# Altium PCB Guillaume_Lanfroid-Nazac.PcbDoc (part 2 of 2)
Units mil, origin at the board's own origin, x right, y up, seen from the top; angles counter-clockwise.
Board outline 2755.91 x 1968.5 mil, 4 copper layers (Top Layer 1, GND, VCC, Bottom Layer 1), stack 61.948 mil thick; 93 components, 75 nets, 367 pads, 172 vias.
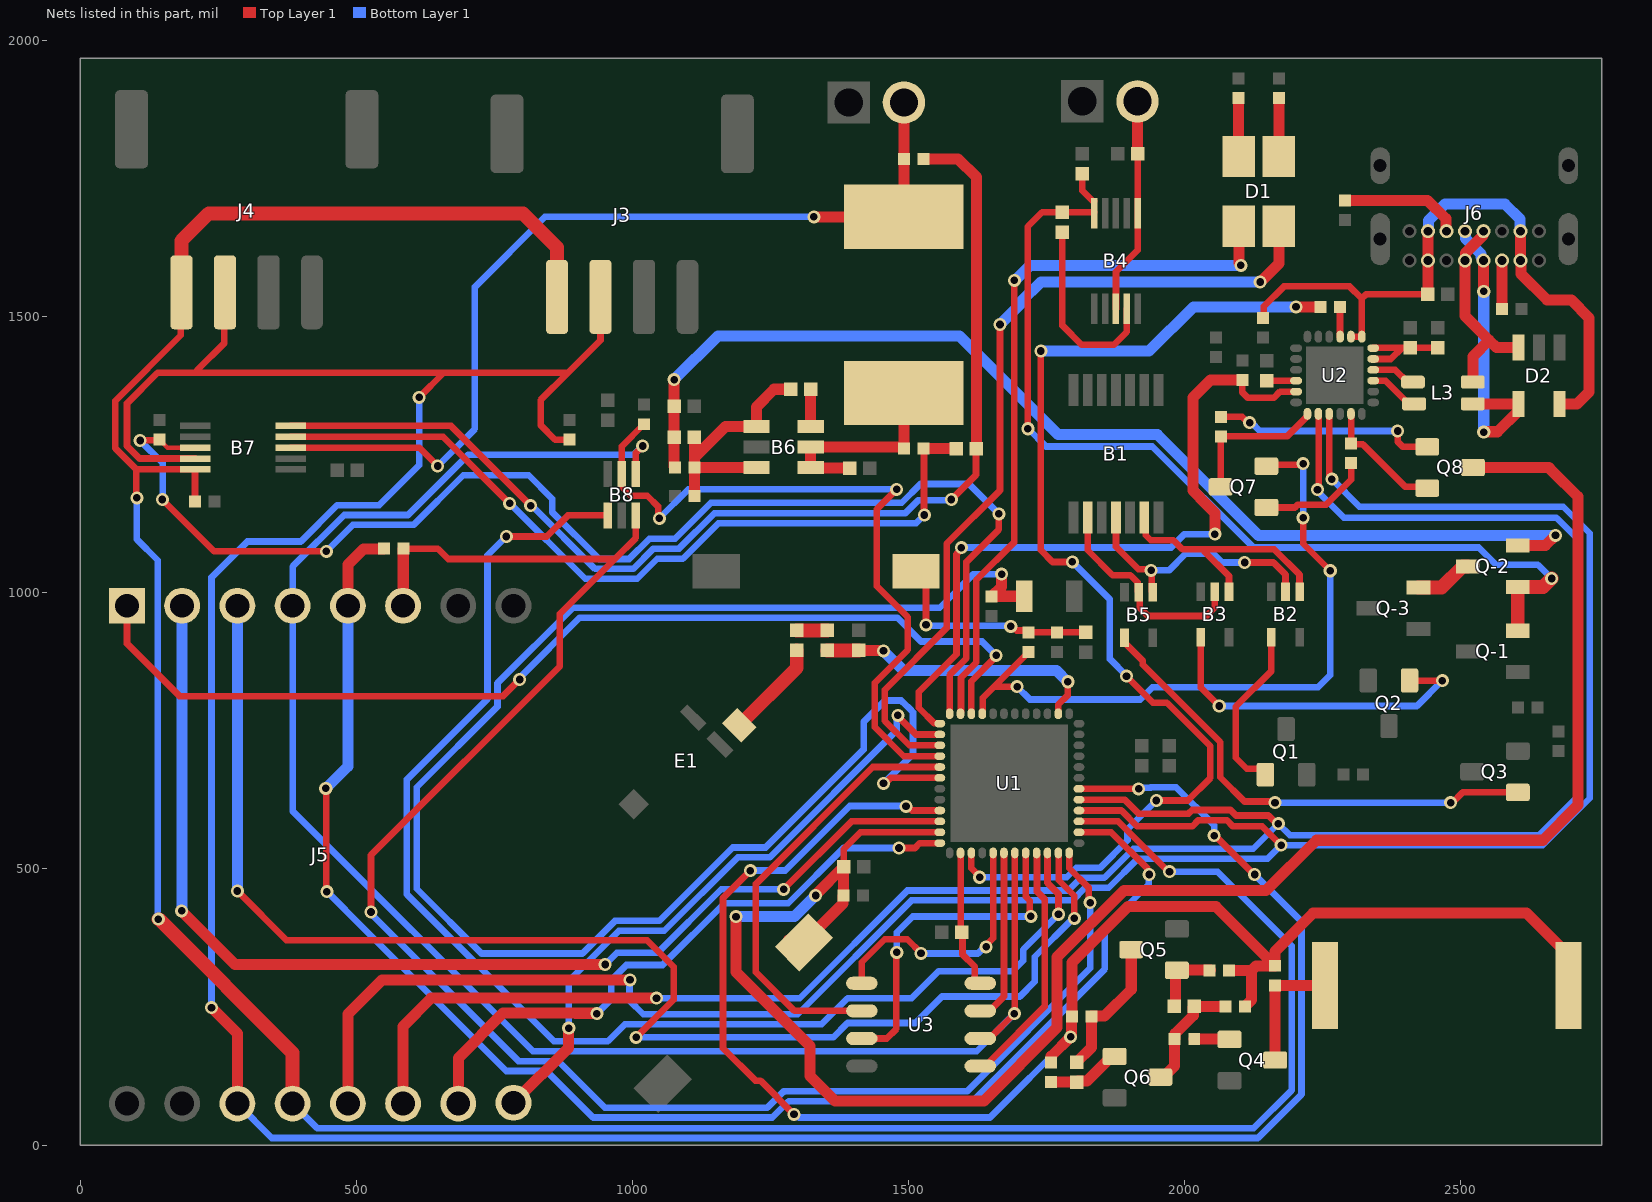
[diagram p4: the nets of this part, all layers, seen from the top]

## Via types
v1: diameter 23.62, hole 13.78, Top Layer 1 to Bottom Layer 1, 143 vias
v2: diameter 19.68, hole 7.87, Top Layer 1 to Bottom Layer 1, 29 vias

## Nets (pads, with @x,y where several pads share a name; then routed paths per layer and width w, separated by ;. In a path a pad name is that pad's centre, name@x,y a point inside that pad or via, vN(x,y) a via of type N, cw(c..) or ccw(c..) an arc to the next point about the centre after c; other vN are vias at no path point) (continued)
NetB1_2: B1.2 B3.2 B5.2 | length 400.2
  Top Layer 1 w12: B1.2@1824.82,1136.33 1824.92,1136.23 1824.92,1077.08 1870,1032 1902.19,1032 1915.13,1019.07 1915.13,1003.21 B5.2@1917,1001.34 1918.87,999.46 1918.87,973.13 1934,958 2040,958 2055,973 B3.2@2055,1002.34 B3.2@2054.14,1001.48
NetB1_4: B1.4 B2.2 B5.1 | length 478.4
  Top Layer 1 w12: B1.4@1876,1136.33 1876.01,1083.5 1916.66,1042.86 1937.34,1042.86 v1(1939.57,1040.63) ; v1@1939.57,1042 1941.08,1040.49 1941.08,1002.85 B5.1@1942.59,1001.34 ; v1(2109,1055) 2161,1055 2183,1033 B2.2@2183,1002.34
  Bottom Layer 1 w12: v1(1939.57,1040.63) 1972.09,1040.63 2002.42,1070.96 2051.91,1070.96 2067.87,1055 v1(2109,1055)
NetB1_6: B1.6 B2.1 B3.1 | length 468.2
  Top Layer 1 w12: B1.6@1927.18,1136.33 1930.04,1133.47 1930.04,1104.33 1938.98,1095.39 1980.01,1095.39 1996.69,1078.72 2037.72,1078.72 ; B3.1@2080.59,1002.34 2080.59,1030.41 2035,1076 2037.72,1078.72 ; B2.1@2208.59,1002.34 2208.25,1002.68 2208.25,1033.07 2162.61,1078.72 2037.72,1078.72
NetB2_4: B2.4 Q1.1 | length 311.9
  Top Layer 1 w12: Q1.1@2146.6,670.66 2146.6,671.72 2136.85,681.47 2112.85,681.47 2093,701.32 2093,794 2157.41,858.41 B2.4@2157.41,919.66
NetB3_4: B3.4 Q2.1 | length 621.3
  Top Layer 1 w12: B3.4@2029.41,919.66 2029.41,828.59 v1(2063,795) ; Q2.1@2407.74,841.34 2408.41,840.67 2466.67,840.67 v1(2467,841)
  Bottom Layer 1 w12: v1(2063,795) 2421,795 v1(2467,841)
NetB4_1: B4.1 B4.8 C2.1 J1.2 | length 392.1
  Top Layer 1 w12: B4.8@1876,1514.39 1876,1581.36 1915.37,1620.73 B4.1@1915.37,1687.61 1915.28,1687.71 1915.28,1794.83 C2.1@1915.06,1795.06
  Top Layer 1 w20: J1.2@1915,1890 J1.2@1915,1890 C2.1@1915.06,1795.06
NetB4_5: B4.5 C1.1 L1.2 Q-1.2 Q-2.1 | length 1765.1
  Top Layer 1 w12: v1(1716.28,1297.16) 1716.28,1663.28 1742.22,1689.22 L1.2@1779,1689.22 1810.86,1689.22 1836.54,1689.2 B4.5@1836.63,1689.11 ; C1.1@1815,1758.89 1815,1728.69 1834.51,1709.17 B4.5@1836.54,1709.17
  Top Layer 1 w25: Q-1.2@2603.61,931.4 Q-2.1@2603.61,1010.6 2649.6,1010.6 v1(2665,1026)
  Bottom Layer 1 w12: v1(1716.28,1297.16) 1717.21,1297.16 1749.28,1265.09 1941.67,1265.09 2124.77,1082 2533,1082 2564,1051 2640,1051 v1(2665,1026)
NetB4_9: B4.9 L1.1 | length 351.7
  Top Layer 1 w12: L1.1@1779,1653 1779,1484 1814,1449 1872,1449 1895.59,1472.59 1895.59,1514.29 B4.9@1895.68,1514.39
NetB5_4: B5.4 Q3.1 | length 890
  Top Layer 1 w12: B5.4@1891.41,918.66 1891.41,909.8 1924.69,876.53 1924.69,869.86 2064.91,729.63 2064.91,666.09 2108.78,622.22 2161.78,622.22 v1(2164,620) ; v1(2482,620) 2485.14,620 2503.74,638.6 Q3.1@2603.68,638.6
  Bottom Layer 1 w12: v1(2164,620) v1(2482,620)
NetB6_1: B6.1 B6.3 C5.1 L2.1 R7.2 R9.1 | length 465.7
  Top Layer 1 w20: L2.1@1112,1282 1112.36,1281.64 1112.36,1244.91 ; R9.1@1112.72,1175 R7.2@1112.72,1227 ; B6.3@1224.79,1226.6 1224.59,1226.8 1112.92,1226.8 R7.2@1112.72,1227 ; C5.1@1286.89,1369 1285,1369 1284.69,1368.69 1256.69,1368.69 1224.79,1336.79 B6.1@1224.79,1301.4 1169.2,1301.4 1112.72,1244.91 R7.2@1112.72,1227
NetB6_4: B6.4 B6.5 C4.1 R6.1 X1.2 | length 379.9
  Top Layer 1 w20: C4.1@1393.89,1226 1393.59,1226.3 1323.51,1226.3 B6.4@1323.21,1226.6 B6.5@1323.21,1264 1489.28,1264 R6.1@1492.28,1261 1492.28,1361.82 X1.2@1492,1362.1
NetB6_6: B6.6 C5.2 | length 67.6
  Top Layer 1 w20: C5.2@1323.11,1369 1323.16,1368.95 1323.16,1301.45 B6.6@1323.21,1301.4
NetB7_3: B7.3 R23.2 U1.12 | length 2396.3
  Top Layer 1 w8: R23.2@144.06,1277.22 150.83,1270.46 150.89,1270.46 158.45,1262.89 B7.3@208.54,1262.89
  Top Layer 1 w12: v1(108.72,1275.82) 109.45,1276.55 143.27,1276.55 R23.2@144,1277.28 ; v1(149,1169) 243,1075 v1(446,1075) ; U1.12@1574.73,780.98 1574.73,851.05 1605.09,881.42 1605.09,1056.09 1664,1115 v1(1664,1143)
  Bottom Layer 1 w12: v1(108.72,1275.82) 150,1234.54 150,1170 v1(149,1169) ; v1(446,1075) 494,1123 604,1123 694,1213 812.54,1213 855,1170.54 855,1146.46 940.18,1061.28 994.28,1061.28 1031,1098 1077.36,1098 1142.36,1163 1488,1163 1522,1197 1610,1197 v1(1664,1143)
NetB7_4: B7.4 J3.3 J4.3 J5.14 R21.2 U1.42 | length 5973.5
  Top Layer 1 w12: B7.4@208.54,1243.21 107.79,1243.21 85,1266 85,1343 140.59,1398.59 216.41,1398.59 ; J4.3@262.52,1544.24 261.34,1543.05 261.34,1452.34 212,1403 216.41,1398.59 ; v1(614,1354) 658.59,1398.59 ; R21.2@886,1277.28 860.43,1277.28 834,1303.72 834,1349 883.59,1398.59 ; J3.3@942.52,1536 942.52,1457.52 883.59,1398.59 ; U1.42@1808.98,645.16 1809.06,645.08 1916.92,645.08 v1(1917,645) ; v1(2053.66,560.34) 2055.33,560.34 2125.67,490 v1(2127,490) ; 216.41,1398.59 658.59,1398.59 ; 658.59,1398.59 883.59,1398.59
  Top Layer 1 w20: v1(238,249) 285,202 J5.14@285,75
  Bottom Layer 1 w12: v1(238,249) 238,1028 303,1093 400,1093 465.81,1158.81 541.81,1158.81 614,1231 v1(614,1354) ; J5.14@285,75 347.29,12.71 2133.03,12.71 2212,91.68 2212,405 v1(2127,490) ; v1(1917,645) 1919.22,647.22 1938.68,647.22 1939.18,647.72 1985.28,647.72 2053.66,579.34 v1(2053.66,560.34)
NetB7_5: B7.5 J3.4 J4.4 J5.13 R22.2 U1.39 | length 5322.4
  Top Layer 1 w12: v1(103,1172) 102.16,1172.84 102.16,1223.52 ; J4.4@183.78,1544.24 182.34,1542.79 182.34,1466.34 64,1348 64,1261.68 102.16,1223.52 ; R22.2@208.28,1165 208.28,1223.43 B7.5@208.38,1223.52 ; B7.5@208.54,1223.52 B7.5@208.38,1223.52 ; U1.39@1808.98,586.1 1880.25,586.1 1971.36,495 v1(1973,495) ; 102.16,1223.52 B7.5@208.38,1223.52
  Top Layer 1 w25: v1(142,409) 143,409 385,167 J5.13@385,75 ; J4.4@183.78,1544.24 183.78,1637.78 233,1687 802.38,1687 863.78,1625.6 J3.4@863.78,1536
  Bottom Layer 1 w12: v1(103,1172) 103,1096.77 140.61,1059.16 140.61,410.39 v1(142,409) ; J5.13@385,75 429.39,30.61 2125.61,30.61 2194.09,99.09 2194.09,360.91 2060,495 v1(1973,495)
NetB7_8: B7.8 J2.2 R5.1 X1.1 | length 1669.2
  Top Layer 1 w12: B7.8@381.77,1262.89 614.57,1262.89 v1(647.73,1229.73)
  Top Layer 1 w20: v1(1329,1681) X1.1@1492,1681 1492.28,1681.28 R5.1@1492.28,1786 1492.14,1786.14 1492.14,1887.86 J2.2@1492,1888 J2.2@1491.64,1887.64
  Bottom Layer 1 w12: v1(647.73,1229.73) 715,1297 715,1554 842,1681 v1(1329,1681)
NetB7_9: B7.9 C3.2 R6.2 | length 1481.3
  Top Layer 1 w12: B7.9@381.77,1282.58 657.42,1282.58 v1(778,1162) ; R6.2@1527.72,1261 1528.36,1260.36 1528.36,1141.64 v1(1529,1141)
  Top Layer 1 w20: R6.2@1527.72,1261 C3.2@1586.89,1261
  Bottom Layer 1 w12: v1(778,1162) 778.46,1162 914.99,1025.47 1009.12,1025.47 1045.36,1061.72 1091.72,1061.72 1156,1126 1514,1126 v1(1529,1141)
NetB7_10: B7.10 C3.1 R5.2 | length 2067.2
  Top Layer 1 w12: B7.10@381.77,1302.26 671.74,1302.26 v1(816,1158) ; v1(1578,1169) 1622.56,1213.56 1622.56,1260.44 C3.1@1623.11,1261
  Top Layer 1 w20: R5.2@1527.72,1786 1590,1786 1623.11,1752.89 C3.1@1623.11,1261
  Bottom Layer 1 w12: v1(816,1158) 818.14,1158 932.76,1043.38 1001.7,1043.38 1038.42,1080.09 1084.77,1080.09 1148.58,1143.91 1494.23,1143.91 1518.32,1168 1577,1168 v1(1578,1169)
NetB8_1: B8.1 U1.34 | length 2438.4
  Top Layer 1 w12: v1(772,1102) 845.24,1102 883.44,1140.2 B8.1@955.41,1140.2 ; U1.34@1751.9,529.02 1751.9,474.78 1772,454.68 v1(1772,418)
  Bottom Layer 1 w12: v1(772,1102) 738,1068 738,808 592,662 592,454 858.09,187.91 955.91,187.91 986.72,218.72 1342.72,218.72 1390,266 1506,266 1555,315 1689,315 1708,334 1708,354 v1(1772,418)
NetB8_3: B8.3 J5.6 R26.1 U1.36 | length 3190.7
  Top Layer 1 w12: v1(527,422) 527,525 869,867 869,962 968.28,1061.28 ; R26.1@585.36,1079.64 R26.1@585.72,1080 648,1080 666.72,1061.28 968.28,1061.28 ; B8.3@1006.59,1140.2 1006.59,1099.59 968.28,1061.28 ; U1.36@1791.27,529.02 1791.27,501.17 1826.86,465.58 1826.86,441.14 v1(1829.08,438.92)
  Top Layer 1 w20: J5.6@585,976.57 585.36,976.93 R26.1@585.36,1079.64
  Bottom Layer 1 w12: v1(527,422) 527,418.86 793.76,152.09 865.91,152.09 950.28,67.72 1244.72,67.72 1274,97 1275.52,97 1275.76,97.24 1606.24,97.24 1829.08,320.08 v1(1829.08,438.92)
NetB8_4: B8.4 J5.4 U1.31 U3.6 | length 3109.1
  Top Layer 1 w12: B8.4@1006.59,1215 1006.59,1253.59 v1(1019,1266) ; U3.6@1630.28,193 1647.02,193 1692.84,238.83 U1.31@1692.84,529.02
  Bottom Layer 1 w12: v1(1019,1266) 1003.28,1250.28 703.28,1250.28 593.91,1140.91 478.37,1140.91 385,1047.54 J5.4@385,976.57 385,605 820,170 1624,170 v1@1691.16,237.16
  other v1: 1692,238
NetB8_5: B8.5 R24.1 U1.16 | length 1316.8
  Top Layer 1 w12: R24.1@1021,1305.28 981,1265.28 B8.5@981,1215 982.87,1213.13 982.87,1190.38 997.53,1175.72 1027.32,1175.72 1046.78,1156.27 1046.78,1137.22 v1(1049,1135) ; v1(1478.82,1187.36) 1443,1151.54 1443,1012 1499,956 1499,896.68 1439.38,837.06 1439.38,756.62 1491.79,704.21 U1.16@1557.02,704.21
  Bottom Layer 1 w12: v1(1049,1135) 1101.36,1187.36 v1(1478.82,1187.36)
NetB9_1: B9.1 R25.2 U1.18 | length 2969.3
  Top Layer 1 w12: v1(1455,655) 1458.14,655 1467.99,664.84 U1.18@1557.02,664.84 ; B9.1@1708.16,996 B9.1@1710.16,994
  Top Layer 1 w20: v1(1669,1034) 1668.31,1033.31 1668.31,1011.02 R25.2@1651,993.72 1651.14,993.86 1710.02,993.86 B9.1@1710.16,994
  Bottom Layer 1 w12: v1(1455,655) 1508.34,708.34 1508.34,783.66 1504.72,787.28 1504.72,787.82 1490.82,801.72 1490.28,801.72 1487,805 1458,805 1419,766 1419,716.32 1241.58,538.91 1182,538.91 1049,405.91 968.58,405.91 909.68,347 727,347 609.91,464.09 609.91,648 755.91,794 755.91,836.45 892.46,973 1557,973 1618,1034 v1(1669,1034)
NetBOOT1_2: BOOT1.2 C12.1 Q8.3 R11.1 U1.23 | length 3444.1
  Top Layer 1 w12: C12.1@1382.89,504 1382.89,535.89 1413.42,566.42 U1.23@1557.02,566.42
  Top Layer 1 w20: v1(1188,413.57) 1187.91,413.48 1187.91,313.09 1321.91,179.09 1321.91,125.09 1367,80 1637,80 1769.55,212.55 1769.55,340.19 1890.36,461 2148,461 2239,552 2649,552 2713,616 2713,1174 2665.97,1221.03 2660,1227 Q8.3@2522.34,1227 ; BOOT1.2@1282.92,370.92 BOOT1.2@1287.31,370.92 ; BOOT1.2@1310.92,366.92 1381.46,437.46 1381.46,451.17 R11.1@1382.28,452 1382.59,452.3 1382.59,503.7 C12.1@1382.89,504 1332.69,453.8 1332.69,452.69 v1(1332,452)
  Bottom Layer 1 w20: v1(1188,413.57) 1293.57,413.57 v1(1332,452)
NetC6_1: C6.1 L2.2 Q-2.2 R7.1 | length 2014.1
  Top Layer 1 w20: v1(1076,1386) 1075.94,1385.94 1075.94,1338.06 C6.1@1075.89,1338 1075.83,1337.94 1075.83,1282.06 L2.2@1075.78,1282 1075.78,1228.5 R7.1@1077.28,1227 ; Q-2.2@2603.61,1085.4 2653.4,1085.4 v1(2672,1104)
  Bottom Layer 1 w20: v1(1076,1386) 1155,1465 1593,1465 1771,1287 1950.75,1287 2133.75,1104 v1(2672,1104)
NetC7_1: C7.1 E1.3 | length 178.7
  Top Layer 1 w25: E1.3@1193.88,760.16 1298.06,864.34 C7.1@1298.06,895.72
NetC7_2: C7.2 C8.1 | length 55.2
  Top Layer 1 w20: C7.2@1298.06,931.94 C7.2@1298.11,932 ; C8.1@1353,932 C8.1@1353.06,932.06
  Top Layer 1 w25: C7.2@1298.06,931.94 1352.94,931.94 C8.1@1353.06,932.06
NetC8_2: C8.2 C9.2 U1.2 | length 524.6
  Top Layer 1 w12: U1.2@1771.58,780.98 1771.58,797.58 1789,815 v1(1789,839)
  Top Layer 1 w20: C9.2@1410.06,895.72 1410.42,895.36 1454.64,895.36 v1(1455,895)
  Top Layer 1 w25: C8.2@1353.06,895.83 1409.94,895.83 C9.2@1410.06,895.72
  Bottom Layer 1 w20: v1(1455,895) 1491,859 1768.02,859 1788.02,839 v1(1789,839)
NetC13_1: C13.1 R10.1 R12.1 RESET1.2 | length 399.3
  Top Layer 1 w12: RESET1.2@1513.91,1039 1532,1020.91 v1(1532,942) ; v1(1685.45,939.45) 1688.6,939.45 1696.21,931.83 1714.6,931.83 R12.1@1718,928.43 R10.1@1769,928.43 1769.2,928.63 1820.8,928.63 C13.1@1821,928.83
  Bottom Layer 1 w12: v1(1532,942) 1533.27,940.73 1684.18,940.73 v1(1685.45,939.45)
NetC14_1: C14.1 Q5.3 R13.1 | length 258.4
  Top Layer 1 w20: C14.1@1805,150.11 1831.72,176.83 R13.1@1831.72,233 1832.11,233.4 1855.4,233.4 1903.66,281.66 Q5.3@1903.66,354
NetC14_2: C14.2 Q6.1 R14.1 | length 135.7
  Top Layer 1 w20: R14.1@1758,114.28 1758.2,114.09 1804.8,114.09 C14.2@1805,113.89 1807.2,116.09 1823.45,116.09 1867.76,160.4 Q6.1@1873.66,160.4 ; Q6.1@1873.36,160.7 Q6.1@1873.66,160.4 ; Q6.1@1873.5,160.56 Q6.1@1873.66,160.4
NetC15_1: C15.1 Q5.1 R15.1 | length 128.8
  Top Layer 1 w20: C15.1@1981.94,251.06 C15.1@1981.89,251 1984.09,253.2 1984.09,314.35 Q5.1@1986.34,316.6 2045.69,316.6 2046.28,316 R15.1@2047.08,316.8
NetC15_2: C15.2 Q6.3 R16.1 R20.1 | length 213.2
  Top Layer 1 w20: Q6.3@1956.34,123 1962.24,123 1982.28,143.04 R20.1@1982.28,192 1983.11,192.83 1983.11,201.54 2015.91,234.34 2015.91,248.8 C15.2@2018.11,251 R16.1@2074.28,251
NetC18_1: C18.1 C19.1 U2.5 U2.6 | length 177.5
  Top Layer 1 w12: U2.5@2341.88,1423.53 2373.68,1423.53 2393.7,1443.55 ; U2.6@2341.88,1443.21 2342.22,1443.55 2393.7,1443.55 ; C19.1@2459,1443.89 C18.1@2409,1443.89 2408.66,1443.55 2393.7,1443.55
NetC21_1: C21.1 U2.16 | length 53.2
  Top Layer 1 w12: C21.1@2149,1383.89 2149.13,1384.02 2201.98,1384.02 U2.16@2202.12,1384.16
NetC?_1: C22.1 U1.26 U3.8 | length 253.7
  Top Layer 1 w12: U1.26@1594.26,528.86 U1.26@1594.42,529.02 1594.76,528.68 1594.76,388.35 1598.11,385 1598.11,345.19 1620.49,322.81 1620.49,298.37 1625.86,293 U3.8@1630.28,293
NetD1_1: D1.1 U1.11 | length 1319.2
  Top Layer 1 w12: U1.11@1594.42,780.98 1594.42,784.42 1595.31,785.31 1595.31,846.31 1623,874 1623,1023 1692,1092 v1(1692,1566)
  Top Layer 1 w20: D1.1@2098.17,1664.02 2098.58,1663.6 2098.58,1597.4 2102,1593.98 v1(2102,1593)
  Bottom Layer 1 w20: v1(1692,1566) 1692.98,1566 1719.98,1593 v1(2102,1593)
NetD1_2: D1.2 R19.2 | length 106.1
  Top Layer 1 w20: D1.2@2098,1790.17 R19.2@2098,1896.28
NetD1_3: D1.3 U1.15 | length 1542.3
  Top Layer 1 w12: U1.15@1557.02,723.9 1501.56,723.9 1457.28,768.18 1457.28,824.35 1569.28,936.35 1569.28,1088.82 1666,1185.54 v1(1666,1486)
  Top Layer 1 w20: v1(2137,1563) 2137.88,1563 2171.49,1596.61 D1.3@2171.49,1663.52
  Bottom Layer 1 w20: v1(1666,1486) 1703.35,1523.35 1703.35,1526.35 1740,1563 v1(2137,1563)
NetD1_4: D1.4 R17.2 | length 106.3
  Top Layer 1 w20: D1.4@2171,1790 R17.2@2171,1896.28
NetD2_3: D2.3 J6.A7 J6.B7 L3.2 | length 374.4
  Top Layer 1 w20: L3.2@2522.15,1381.68 2522.15,1428 2551.57,1457.43 ; J6.B7@2541.54,1653.49 2540.47,1652.42 2540.47,1646.81 2509.14,1615.48 2509.14,1602.92 J6.A7@2508.07,1601.85 2508.07,1500.93 2551.57,1457.43 ; D2.3@2604.6,1444.18 2564.82,1444.18 2551.57,1457.43
NetD2_4: D2.4 J6.A6 J6.B6 L3.3 | length 551.9
  Top Layer 1 w20: L3.3@2522.15,1342.32 2522.4,1342.07 2604.35,1342.07 D2.4@2604.6,1341.82 2604.6,1329.03 2567.27,1291.69 2542.69,1291.69 v1(2542,1291) ; J6.A6@2541.54,1601.85 2541.77,1601.62 2541.77,1546.23 v1(2542,1546)
  Bottom Layer 1 w20: J6.B6@2508.07,1655 2509.14,1653.93 2509.14,1641.37 2536.77,1613.74 2536.77,1608.13 2541.54,1603.36 J6.A6@2541.54,1601.85 ; v1(2542,1291) v1(2542,1546)
NetJ5_1: J5.1 U1.10 | length 1895.1
  Top Layer 1 w12: J5.1@85,976.57 85,908 180,813 766,813 v1(796,843) ; U1.10@1614.1,780.98 1614.1,839.78 1658.93,884.61 v1(1658.93,886.72)
  Bottom Layer 1 w12: v1(796,843) 796,846 905.09,955.09 1479.91,955.09 1523,912 1633.65,912 v1(1658.93,886.72)
NetJ5_2: J5.2 U1.22 | length 2073.5
  Top Layer 1 w12: v1(1274.21,463.19) 1397.12,586.1 U1.22@1557.02,586.1
  Top Layer 1 w20: v1(184,424) 281,327 v1(951,327)
  Bottom Layer 1 w12: v1(951,327) 972,348 1046,348 1161.19,463.19 v1(1274.21,463.19)
  Bottom Layer 1 w20: v1(184,424) 184.5,424.5 184.5,976.07 J5.2@185,976.57
NetJ5_3: J5.3 U1.35 | length 2559.3
  Top Layer 1 w12: v1(285,460) 374,371 1027,371 1075,323 1075,263 v1(1007,195) ; U1.35@1771.58,529.02 1771.58,525.58 1772.47,524.69 1772.47,479.53 1800.58,451.42 v1(1800.58,410.42)
  Bottom Layer 1 w12: v1(1007,195) 1364,195 1390,221 1513,221 1561,269 1702,269 1729,296 1729,341 1798.42,410.42 v1(1800.58,410.42)
  Bottom Layer 1 w20: v1(285,460) J5.3@285,976.57
NetJ5_5: J5.5 R26.2 U1.38 | length 2743.9
  Top Layer 1 w12: v1(445,646) 446,645 446,460 v1(447,459) ; U1.38@1808.98,566.42 1867.12,566.42 1933.78,499.76 1933.78,492.22 v1(1936,490)
  Top Layer 1 w20: J5.5@485,976.57 485,1051 513.17,1079.17 549.46,1079.17 R26.2@550.28,1080
  Bottom Layer 1 w12: v1(447,459) 514.72,391.28 771.81,134.19 844.81,134.19 929.19,49.81 1253.65,49.81 1283.18,79.34 1616.34,79.34 1856,319 1856,393 1935.42,472.42 1935.42,489.42 v1(1936,490)
  Bottom Layer 1 w20: v1(445,646) 485,686 J5.5@485,976.57
NetJ5_9: J5.9 U1.14 | length 1163
  Top Layer 1 w12: v1(1481,778) 1481,776.32 1513.74,743.58 U1.14@1557.02,743.58
  Top Layer 1 w20: J5.9@785,76.57 785,76.79 884.31,176.09 884.31,210.93 v1(885,211.62)
  Bottom Layer 1 w12: v1(885,211.62) 885,297 976,388 1058,388 1191,521 1249,521 1478.78,750.78 1478.78,775.78 v1(1481,778)
NetJ5_10: J5.10 U1.24 | length 1137.4
  Top Layer 1 w12: v1(1483,538) 1512,538 1520.73,546.73 U1.24@1557.02,546.73
  Top Layer 1 w20: J5.10@685,75 685,158 766.34,239.34 896.48,239.34 897.13,238.69 935.31,238.69 v1(936,238)
  Bottom Layer 1 w12: v1(936,238) 962.2,264.2 962.2,298.74 989.46,326 1055,326 1167,438 1282.56,438 1382.56,538 v1(1483,538)
NetJ5_11: J5.11 U1.41 U2.20 | length 3958.4
  Top Layer 1 w12: U1.41@1808.98,625.47 1891.53,625.47 1916.72,600.28 2007.61,600.28 2014.14,606.81 2083.51,606.81 2093.42,596.91 2151.95,596.91 2166.86,582 v1(2170,582) ; v1(2241,1187) 2243.19,1189.19 2243.19,1318.21 2242.81,1318.58 2242.81,1323.03 U2.20@2243.19,1323.4
  Top Layer 1 w20: J5.11@585,75 585,215 636,266 v1(1044,266)
  Bottom Layer 1 w12: v1(1044,266) 1303.36,266 1498.36,461 1789.68,461 1812.68,484 1855,484 1907.62,536.62 2124.62,536.62 v1(2170,582) 2191.09,560.91 2641.58,560.91 2716.09,635.42 2716.09,1093.45 2673.54,1136 2289,1136 2241,1184 v1(2241,1187)
NetJ5_12: J5.12 U1.40 U2.21 | length 4156.6
  Top Layer 1 w12: U1.40@1808.98,605.79 1885.89,605.79 1914.58,577.09 2014.09,577.09 2025.47,588.47 2076.53,588.47 2087.91,577.09 2140.91,577.09 v1(2175,543) ; U2.21@2262.08,1324.04 2262.08,1213.97 2266.91,1209.14 v1(2266.91,1206)
  Top Layer 1 w20: J5.12@485,75 485,237 547,299 v1(996,299)
  Bottom Layer 1 w12: v1(996,299) 995,298 995,262 1020,237 1299.68,237 1505.68,443 1797,443 1820,466 1863,466 1915.72,518.72 2150.72,518.72 v1(2175,543) 2649,543 2734,628 2734,1108 2686,1156 2316.91,1156 v1(2266.91,1206)
NetJ6_A5: J6.A5 R30.1 | length 88
  Top Layer 1 w20: J6.A5@2575,1601.85 2575.14,1601.71 2575.14,1514.14 R30.1@2575.28,1514
NetJ6_B5: J6.B5 R29.1 | length 219.2
  Top Layer 1 w20: R29.1@2291,1710.72 2440.28,1710.72 2473.54,1677.46 2473.54,1656.07 J6.B5@2474.61,1655
NetL3_1: L3.1 U2.4 | length 81.2
  Top Layer 1 w12: U2.4@2341.88,1403.84 2381.88,1403.84 2404.04,1381.68 L3.1@2413.88,1381.68
NetL3_4: L3.4 U2.3 | length 91.3
  Top Layer 1 w12: U2.3@2341.88,1384.16 2364.17,1384.16 2406.01,1342.32 L3.4@2415.85,1342.32
NetLS1_N: LS1.N Q4.3 R18.1 | length 226.1
  Top Layer 1 w20: Q4.3@2164.34,154 2164.17,154.17 2164.17,289.11 R18.1@2164,289.28 2254.24,289.28 LS1.N@2254.53,289
NetLS1_P: LS1.P R13.2 R14.2 R15.2 R16.2 R18.2 U1.21 | length 2959.6
  Top Layer 1 w12: v1(1213.91,497.09) 1164.28,447.46 1164.28,175.43 1223.08,116.64 1231.98,116.64 v1(1293,55.62) ; v1(1495.79,613.42) 1498.93,613.42 1506.57,605.79 U1.21@1557.02,605.79
  Top Layer 1 w20: R14.2@1758,149.72 1758.83,150.54 1758.83,160.83 v1(1794,196) 1794,196.98 1795.46,198.44 1795.46,232.17 R13.2@1796.28,233 1796.28,330.28 1898,432 2056.72,432 R18.2@2164,324.72 ; R15.2@2080.72,316 2121.27,316 ; R16.2@2109.72,251 2121.27,262.56 2121.27,316 ; LS1.P@2695.47,289 2695.47,344.12 2619.59,420 2233.28,420 2164,350.72 R18.2@2164,324.72 ; 2121.27,316 2121.54,316 2129.43,323.89 2163.17,323.89 R18.2@2164,324.72
  Bottom Layer 1 w12: v1(1213.91,497.09) 1277.09,497.09 1394,614 1495.21,614 v1(1495.79,613.42) ; v1(1293,55.62) 1296.14,55.62 1301.96,49.81 1647.81,49.81 v1(1794,196)
NetQ4_1: Q4.1 R20.2 | length 64.2
  Top Layer 1 w20: R20.2@2017.72,192 2018.02,191.7 2081.36,191.7 Q4.1@2081.66,191.4
NetQ7_1: Q7.1 R31.2 | length 204.8
  Top Layer 1 w12: Q7.1@2148.34,1154.6 2200.06,1154.6 2205.18,1159.72 2256.72,1159.72 2302,1205 R31.2@2302,1235.28
NetQ7_2: Q7.2 R12.2 U1.9 | length 1255.6
  Top Layer 1 w12: U1.9@1633.79,780.98 1633.79,784.42 1634.68,785.31 1634.68,809.68 1655,830 ; v1(1697,830) 1655,830 ; R12.2@1718,893 1655,830 ; Q7.2@2148.34,1229.4 2150.71,1231.78 2212.78,1231.78 v1(2215,1234) ; v1(2215,1136) 2215,1089 v1(2264,1040)
  Bottom Layer 1 w12: v1(1697,830) 1720.15,806.85 1919.85,806.85 1942,829 2242,829 2264,851 v1(2264,1040) ; v1(2215,1136) v1(2215,1234)
NetQ7_3: Q7.3 R32.1 U2.19 | length 267.6
  Top Layer 1 w12: Q7.3@2065.66,1192 2065.83,1192.17 2065.83,1283.11 R32.1@2066,1283.28 2185.89,1283.28 2222.79,1320.18 U2.19@2222.79,1324.12 U2.19@2222.89,1324.01
NetQ8_1: Q8.1 R32.2 | length 407.4
  Top Layer 1 w12: R32.2@2066,1318.72 2070.69,1318.72 2070.83,1318.86 2104.28,1318.86 2114.86,1308.28 v1(2118,1308.28) ; v1(2386,1293) 2386,1274 2395.6,1264.4 Q8.1@2439.66,1264.4
  Bottom Layer 1 w12: v1(2118,1308.28) 2121.14,1308.28 2136.43,1293 v1(2386,1293)
NetQ8_2: Q8.2 R31.1 U2.23 | length 224.9
  Top Layer 1 w12: U2.23@2301.53,1324.12 2301.76,1323.88 2301.76,1270.95 2303.91,1268.8 2323.2,1268.8 2400.04,1191.96 2437.3,1191.96 Q8.2@2439.66,1189.6
"NetQ -2_3": Q-2.3 Q-3.2 | length 105.4
  Top Layer 1 w25: Q-3.2@2423.61,1009.4 2465.61,1009.4 2503.91,1047.7 2512.77,1047.7 Q-2.3@2513.06,1048
NetR27_1: R27.1 U1.27 | length 2030.1
  Top Layer 1 w12: U1.27@1614.1,529.02 1614.1,501.17 1629,486.28 v1(1629,485) ; v1(1740,1438) 1740,1077 1761.19,1055.81 1796.81,1055.81 v1(1797,1056) ; v1(1895,849) 1943,801 1968.22,801 2047,722.22 2047,665 2006,624 v1(1949,624)
  Top Layer 1 w20: v1(2202,1518) R27.1@2246.28,1518
  Bottom Layer 1 w12: v1(1629,485) 1787,485 1804,502 1847,502 1896.89,551.89 1896.89,571.89 v1(1949,624) ; v1(1797,1056) 1865,988 1865,880 1895,850 v1(1895,849)
  Bottom Layer 1 w20: v1(1740,1438) 1936,1438 2016,1518 v1(2202,1518)
NetR27_2: R27.2 U2.9 | length 54.2
  Top Layer 1 w12: R27.2@2281.72,1518 2281.78,1517.94 2281.78,1463.94 U2.9@2281.84,1463.88
NetR28_1: R28.1 U1.13 U2.17 | length 1336.1
  Top Layer 1 w12: U1.13@1557.02,763.27 1556.68,763.61 1547.39,763.61 1519,792 1519,820.64 1587.19,888.83 1587.19,1070.04 1596,1078.86 v1(1596,1082) ; R28.1@2105,1385.28 2104.51,1384.8 2104.51,1363.49 2115,1353 2161.82,1353 2173.29,1364.47 U2.17@2202.12,1364.47 U2.17@2201.85,1364.74
  Top Layer 1 w20: v1(2055.12,1106.3) 2055.12,1144.95 2028.1,1171.97 2028.1,1172.69 2015.75,1185.04 2015.75,1353.75 2047.28,1385.28 R28.1@2105,1385.28
  Bottom Layer 1 w12: v1(1596,1082) 1975.86,1082 2000.15,1106.3 v1(2055.12,1106.3)
NetU1_17: U1.17 U3.2 | length 801.3
  Top Layer 1 w12: U3.2@1415.72,243 1294,243 1224,313 1224,473 1435.53,684.53 U1.17@1557.02,684.53
NetU1_29: U1.29 U3.1 | length 471.9
  Top Layer 1 w12: U3.1@1415.72,293 1415.72,331.16 1457.28,372.72 1498.07,372.72 1523,347.79 v1(1523,347) ; v1(1641,359) 1641,362.14 1653.47,374.62 U1.29@1653.47,529.02
  Bottom Layer 1 w12: v1(1523,347) 1625.86,347 1637.86,359 v1(1641,359)
NetU1_30: U1.30 U3.7 | length 313.6
  Top Layer 1 w12: U3.7@1630.28,243 1647.02,243 1673.16,269.14 U1.30@1673.16,529.02
NetU1_32: U1.32 U3.3 | length 618.7
  Top Layer 1 w12: U3.3@1415.72,193 1460.97,193 1478.37,210.4 1478.37,348.37 v1(1479,349) ; U1.32@1712.53,529.02 1712.53,449.81 1719.78,442.56 1719.78,416.22 v1(1722,414)
  Bottom Layer 1 w12: v1(1479,349) 1479,385 1508,414 v1(1722,414)
NetU1_33: U1.33 U3.5 | length 448.2
  Top Layer 1 w12: U3.5@1630.28,143 1643.87,143 1649.24,148.37 1649.24,153.24 1746.72,250.72 1746.72,445.28 1733.1,458.9 1733.1,524.69 1732.21,525.58 U1.33@1732.21,529.02
VBUS: C20.1 D2.5 J6.A4 J6.A9 J6.B4 J6.B9 R1.1 U2.7 U2.8 | length 1210.8
  Top Layer 1 w12: R1.1@2142,1497.72 2143.91,1499.63 2143.91,1518.91 2180,1555 2299,1555 2321.21,1532.79 ; U2.8@2301.53,1463.88 U2.7@2321.21,1463.88 2321.21,1532.79 ; C20.1@2441.02,1541.13 C20.1@2440.89,1541 2329.43,1541 2321.21,1532.79
  Top Layer 1 w20: C20.1@2441.02,1541.13 2441.02,1601.72 J6.A9@2441.14,1601.85 J6.B4@2441.14,1655 ; J6.B9@2608.46,1655 J6.A4@2608.46,1601.85 2609.53,1600.78 2609.53,1577.47 2657,1530 2701,1530 2733,1498 2733,1364 2711,1342 D2.5@2679.5,1342
  Bottom Layer 1 w20: J6.B4@2441.14,1655 2442.21,1656.07 2442.21,1674.21 2472,1704 2580,1704 2607.39,1676.61 2607.39,1656.07 J6.B9@2608.46,1655
pads on no net: B1.8 B1.9 B1.10 B1.11 B1.12 B1.13 D2.1 E1.1 E1.4 J3.MP1 J3.MP2 J4.MP1 J4.MP2 J5.15 J6.A8 J6.B8 U1.5 U1.6 U1.7 U1.8 U1.20 U1.25 U1.28 U1.44 U1.45 U1.47 U1.48 U2.1 U2.10 U2.11 U2.12 U2.13 U2.14 U2.15 U2.18 U2.22 U2.24 U2.25
copper on no net:
  other v2: 2250.35,1372.35 2293.65,1372.35 2250.35,1415.65 2293.65,1415.65

## Polygon pours and split planes (outlines as drawn)
GND on GND "NONET_L-01_P-001" (solid, pour order 0): 15,1954 2744,1954 2744,15 2743,13 15,13
3V3 on VCC "NONET_L-01_P-001" (solid, pour order 1): 10,1960 2745,1960 2745,10 2743,14 11,14
GND on Top Layer 1 "NONET_L-01_P-001" (solid, pour order 2): 10,1960 2750,1960 2750,10 10,11
GND on Bottom Layer 1 "NONET_L-01_P-001" (solid, pour order 3): 10,1960 2750,1960 2750,10 9,8

## Other copper
Top Layer 1:
  pour cut-out: 906,596 989,517 1088.96,509.04 1295.92,716 1295.92,797.92 1198,895.83 1102,895.83 906,724
GND:
  pour cut-out: 907.17,596.94 988.96,517.82 1088.83,509.83 1295.17,716.17 1295.17,796.51 1197.17,894.51 1103.22,894.51 907.17,723.68
VCC:
  pour cut-out: 907,596.07 987.5,518.5 1089,510 1295.5,715 1295.5,796.5 1197,895 1103,895 907,723.81
Bottom Layer 1:
  pour cut-out: 906.88,596.27 988.38,514.77 1089.88,509.27 1296.88,716.27 1296.88,795.27 1197.88,894.27 1102.88,894.27 906.88,723.27

## Silkscreen, mask and mechanical layers (free items; w line width, h text height)
Mechanical 1:
  the board outline again, w10

## Dimensions
0,0 to 2755.91,0 on Top Overlay
0,0 to 0,1968.5 on Top Overlay

## Text inside footprints (layer, text, board x,y; h text height)
J6: Mechanical 13 "PCB EDGE" at 2334.8,1828.5 h32 r180
LS1: Top Overlay "+" at 2774.21,261.44 h50 r180; Top Overlay "-" at 2175.79,261.44 h50 r180; Mechanical 13 "+" at 2774.21,261.44 h50 r180; Mechanical 13 "-" at 2175.79,261.44 h50 r180
Q1: Mechanical 9 "SOT-23" at 2128.24,702.16 h19.68
Q2: Mechanical 9 "SOT-23" at 2426.09,809.84 h19.68 r180
Q3: Mechanical 9 "SOT-23" at 2572.18,620.24 h19.68 r90
Q4: Mechanical 9 "SOT-23" at 2113.16,209.76 h19.68 r270
Q5: Mechanical 9 "SOT-23" at 1954.84,298.24 h19.68 r90
Q6: Mechanical 9 "SOT-23" at 1905.16,178.76 h19.68 r270
Q7: Mechanical 9 "SOT-23" at 2116.84,1136.24 h19.68 r90
Q8: Mechanical 9 "SOT-23" at 2471.16,1282.76 h19.68 r270